# EAGLE board h-bridge_X2 (EAGLE 5.06)
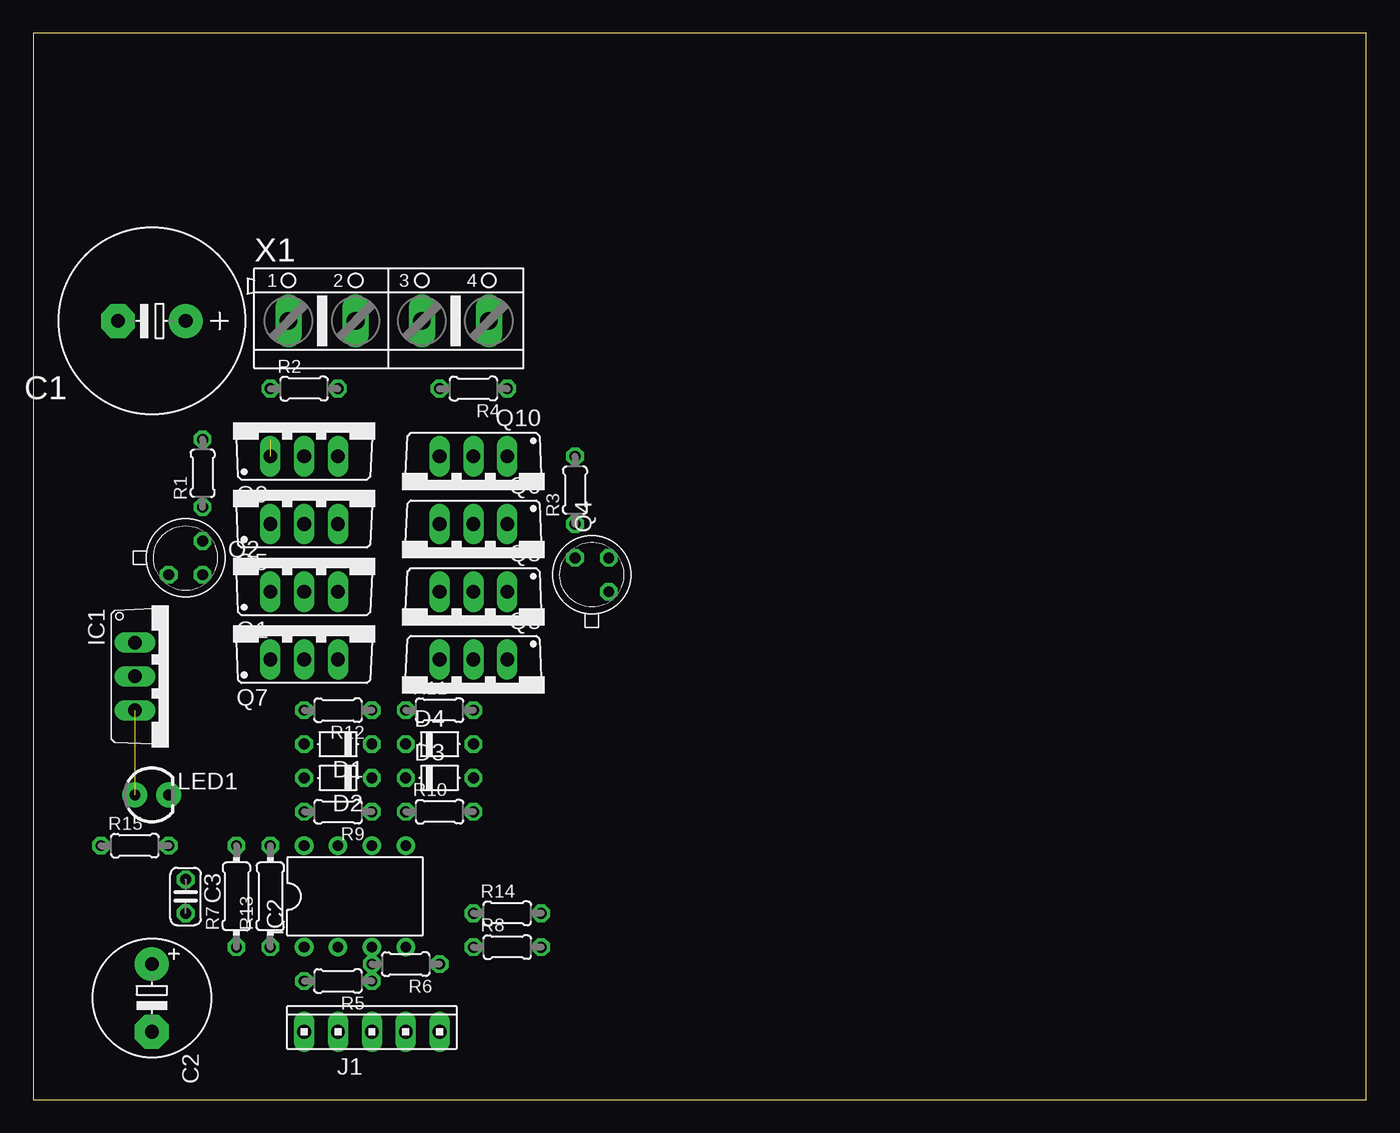
[diagram p0: board, top side]
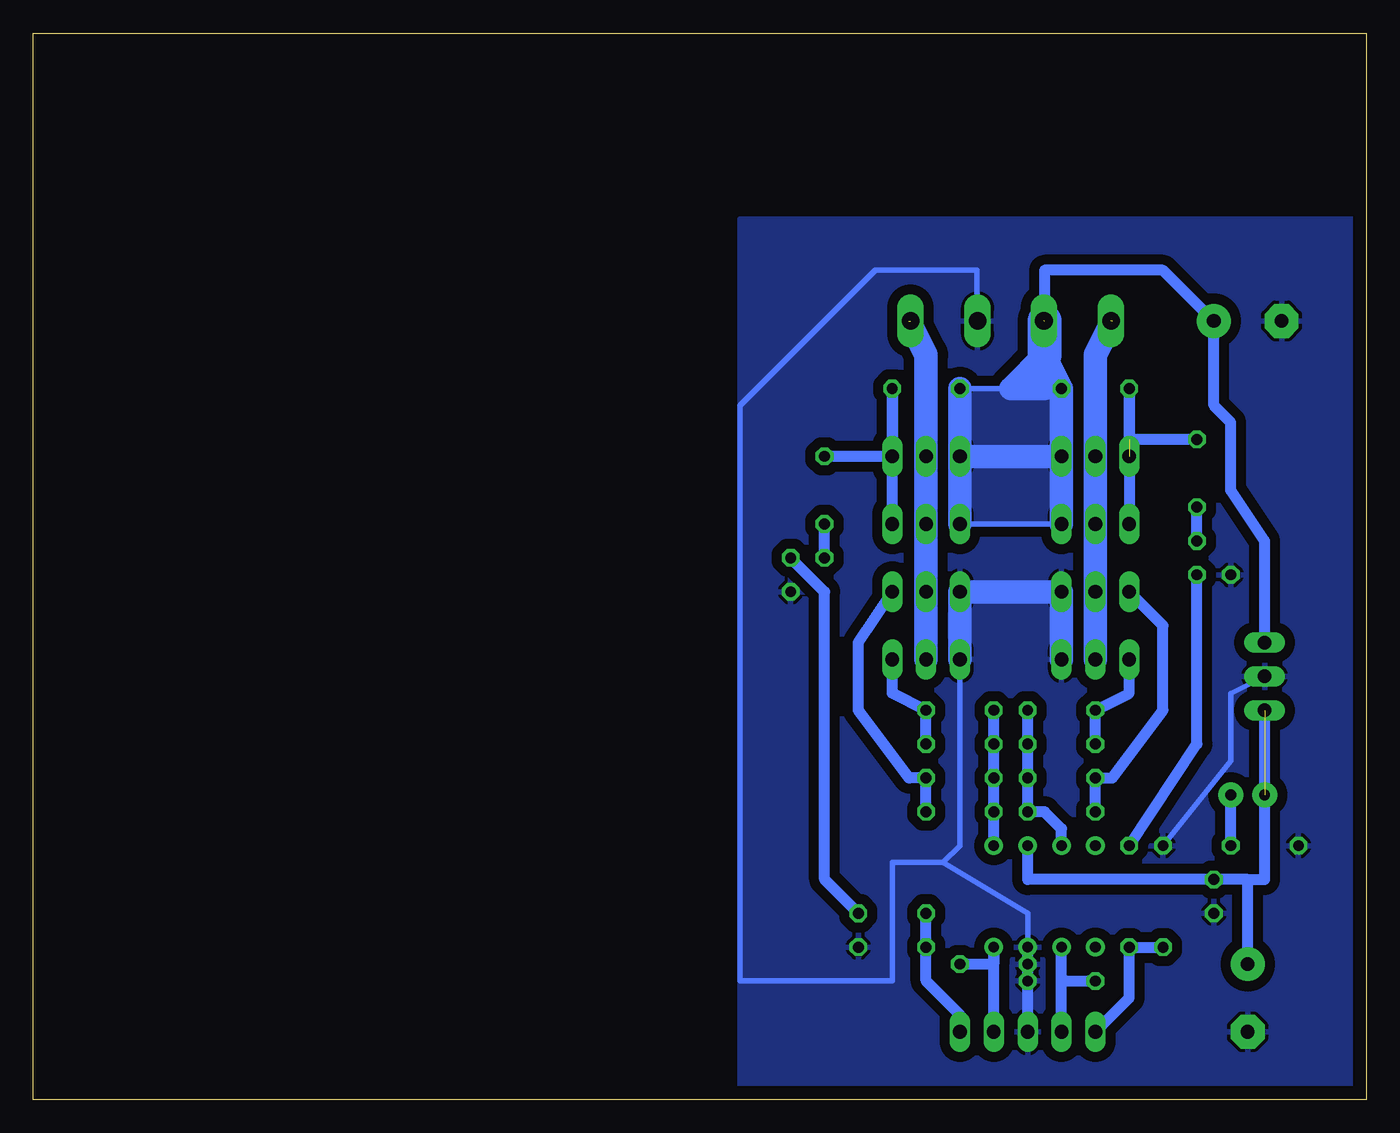
[diagram p1: board, bottom side, seen from below]

Size 100 x 80 mm. Coordinates in mm from the lower left corner, seen from the top.
Outline: 0,0 100,0 100,80 0,80 0,0
Copper layers (1*16): Top 0.035mm / dielectric 1.5mm / Bottom 0.035mm
Design rules "default *": minimum track width 10mil, minimum drill 24mil, track to track 30mil, track to pad 30mil, pad to pad 8mil, via to via 8mil, smd to smd 8mil, copper to edge 40mil, drill to drill 8mil, minimum pad ring 10mil, minimum via ring 8mil, stop-mask expansion 4mil, vias tented up to drill 0mil, thermal gap 10mil

## Footprints (pad centres in the part's own frame; a part is rotated, then mirrored left to right if it is on the bottom)
E5-13 = drill 1.016 pad 2.54 round: + -2.54,0 | drill 1.016 pad 2.54 octagon: - 2.54,0
E5-8,5 = drill 1.016 pad 2.54 round: + -2.54,0 | drill 1.016 pad 2.54 octagon: - 2.54,0
C025-024X044 = drill 0.813 octagon: 1 -1.27,0; 2 1.27,0
D-5 = drill 0.813 octagon: A 2.54,0; C -2.54,0
TO220V = drill 1.016 long: 1 -2.54,-2.54; 2 0,-2.54; 3 2.54,-2.54
DIL08 = drill 0.8 pad 1.4 round: 1 -3.81,-3.81; 2 -1.27,-3.81; 3 1.27,-3.81; 4 3.81,-3.81; 5 3.81,3.81; 6 1.27,3.81; 7 -1.27,3.81; 8 -3.81,3.81
10X05MTA = drill 1.016 long: 1 5.08,0; 2 2.54,0; 3 0,0; 4 -2.54,0; 5 -5.08,0
LED3MM = drill 0.813 pad 1.88 round: A -1.27,0; K 1.27,0
TO220BV = drill 1.016 long: D 0,-2.54; G -2.54,-2.54; S 2.54,-2.54
TO-52 = drill 0.813 octagon: 1 -1.27,-1.27; 2 1.27,-1.27; 3 1.27,1.27
0204/5 = drill 0.813 octagon: 1 -2.54,0; 2 2.54,0
0204/7 = drill 0.813 octagon: 1 -3.81,0; 2 3.81,0
AK500/4 = drill 1.321 long: 1 -7.518,0; 2 -2.489,0; 3 2.489,0; 4 7.518,0

## Placement (x,y rotation side)
C1  [E5-13]  8.89,58.42 180 top
C2  [E5-8,5]  8.89,7.62 270 top
C3  [C025-024X044]  11.43,15.24 270 top
D1  1N4148DO35-7  [D-5]  22.86,26.67 180 top
D2  1N4148DO35-7  [D-5]  22.86,24.13 180 top
D3  1N4148DO35-7  [D-5]  30.48,24.13 0 top
D4  1N4148DO35-7  [D-5]  30.48,26.67 0 top
IC1  7812TV  [TO220V]  10.16,31.75 270 top
IC2  IR4427  [DIL08]  24.13,15.24 0 top
J1  [10X05MTA]  25.4,5.08 0 top
LED1  [LED3MM]  8.89,22.86 0 top
Q1  [TO220BV]  20.32,40.64 0 top
Q2  VN0106N9  [TO-52]  11.43,40.64 0 top
Q3  [TO220BV]  33.02,35.56 180 top
Q4  VN0106N9  [TO-52]  41.91,39.37 90 top
Q5  [TO220BV]  20.32,45.72 0 top
Q6  [TO220BV]  33.02,40.64 180 top
Q7  [TO220BV]  20.32,35.56 0 top
Q8  [TO220BV]  33.02,30.48 180 top
Q9  [TO220BV]  20.32,50.8 0 top
Q10  [TO220BV]  33.02,45.72 180 top
R1  [0204/5]  12.7,46.99 90 top
R2  [0204/5]  20.32,53.34 0 top
R3  [0204/5]  40.64,45.72 90 top
R4  [0204/5]  33.02,53.34 180 top
R5  [0204/5]  22.86,8.89 180 top
R6  [0204/5]  27.94,10.16 180 top
R7  [0204/7]  15.24,15.24 90 top
R8  [0204/5]  35.56,11.43 0 top
R9  [0204/5]  22.86,21.59 180 top
R10  [0204/5]  30.48,21.59 0 top
R11  [0204/5]  30.48,29.21 0 top
R12  [0204/5]  22.86,29.21 180 top
R13  [0204/7]  17.78,15.24 90 top
R14  [0204/5]  35.56,13.97 0 top
R15  [0204/5]  7.62,19.05 0 top
X1  [AK500/4]  26.67,58.42 0 top

## Library data of the parts
C1-C3 R5 R6 = rcl
D1-D4 = diode
IC1 = linear
IC2 = ir
J1 = con-amp
LED1 = SparkFun
Q1 Q3 Q5-Q10 = transistor-power
Q2 Q4 = transistor-fet
R1-R4 R7-R15 = resistor
X1 = con-ptr500

## Nets
GND: C1.- C2.- C3.2 IC1.2 IC2.3 J1.3 Q1.S Q2.1 Q3.S Q4.1 Q7.S Q8.S R5.1 R6.2 R7.2 R8.2 R15.1 X1.3
N$1: Q4.2 R14.2
N$2: Q5.G Q9.G R1.2 R2.1
N$3: Q6.G Q10.G R3.2 R4.1
N$5: Q1.D Q5.D Q7.D Q9.D X1.1
N$6: Q3.D Q6.D Q8.D Q10.D X1.4
N$7: Q2.3 R1.1
N$9: Q4.3 R3.1
N$10: J1.5 R7.1 R13.1
N$11: J1.1 R8.1 R14.1
N$12: IC2.4 J1.2 R6.1
N$13: IC2.2 J1.4 R5.2
N$14: D2.A Q1.G R9.2
N$16: C2.+ C3.1 IC1.3 IC2.6 LED1.A
N$17: D3.A Q3.G R10.2
N$18: D3.C D4.C IC2.5 R10.1 R11.1
N$19: D1.C D2.C IC2.7 R9.1 R12.1
N$20: D1.A Q7.G R12.2
N$21: D4.A Q8.G R11.2
N$22: LED1.K R15.2
N$24: Q2.2 R13.2
V+: C1.+ IC1.1 Q5.S Q6.S Q9.S Q10.S R2.2 R4.2 X1.2

## Tracks (layer width: path | path; a pad name or v marks a point on that pad's centre or on a via)
GND
  Bottom 0.406: IC2.3 25.4,13.97 31.75,17.78 | 29.21,58.42 29.21,62.23 36.83,62.23 46.99,52.07 46.99,8.89 35.56,8.89 35.56,17.78 31.75,17.78 | R7.2 10.16,25.4 10.16,30.48 IC1.2 | Q8.S 30.48,19.05 31.75,17.78
  Bottom 0.813: IC2.3 R5.1 J1.3
  Bottom 1.778: Q7.S Q1.S Q3.S Q8.S
  pour Bottom: 0,66.04 46.99,66.04 46.99,0 0,0
N$1
  Bottom 0.813: R14.2 40.64,16.51 40.64,38.1 Q4.2
N$2  (1 unrouted)
  Bottom 0.813: R1.2 17.78,49.53 R2.1 Q5.G
N$3
  Bottom 0.813: Q6.G R4.1 Q10.G R3.2
N$5  (1 unrouted)
  Bottom 1.778: Q7.D Q1.D Q5.D Q9.D 20.32,55.88 19.05,58.42
N$6  (1 unrouted)
  Bottom 1.778: Q8.D Q3.D Q6.D Q10.D 33.02,55.88 34.29,58.42
N$7
  Bottom 0.813: Q2.3 R1.1
N$9
  Bottom 0.813: Q4.3 R3.1
N$10
  Bottom 0.813: R7.1 R13.1 17.78,7.62 J1.5
N$11
  Bottom 0.813: R14.1 R8.1 33.02,8.89 30.48,6.35 J1.1
N$12
  Bottom 0.813: J1.2 IC2.4 27.94,10.16 R6.1
N$13
  Bottom 0.813: 22.86,8.89 IC2.2 | J1.4 22.86,8.89 | 22.86,8.89 R5.2
N$14
  Bottom 0.813: Q1.G 15.24,35.56 15.24,29.21 19.05,24.13 D2.A | R9.2 D2.A | R9.2 D2.A | R9.2 D2.A | R9.2 D2.A
N$16  (1 unrouted)
  Bottom 0.813: IC2.6 25.4,16.51 C3.1 8.89,16.51 | C2.+ 8.89,16.51 | 8.89,16.51 7.62,16.51 IC1.3
N$17
  Bottom 0.813: D3.A R10.2 D3.A | D3.A 34.29,24.13 38.1,29.21 38.1,34.29 Q3.G
N$18
  Bottom 0.813: R10.1 IC2.5 R10.1 | R10.1 D3.C | D3.C D4.C | D4.C R11.1 D4.C | R10.1 D3.C | D3.C D4.C
N$19
  Bottom 0.813: R9.1 D2.C | D2.C D1.C | D1.C R12.1 D1.C | IC2.7 22.86,20.32 24.13,21.59 R9.1 | D2.C D1.C | R9.1 D2.C
N$20
  Bottom 0.813: Q7.G 17.78,30.48 R12.2 D1.A
N$21
  Bottom 0.813: Q8.G 35.56,30.48 R11.2 D4.A
N$22
  Bottom 0.813: R15.2 LED1.K
N$24
  Bottom 0.813: R13.2 12.7,26.67 Q2.2
V+  (1 unrouted)
  Bottom 0.406: Q5.S Q6.S | R2.2 24.13,53.34 | 26.67,53.34 R4.2
  Bottom 0.813: IC1.1 7.62,41.91 10.16,45.72 10.16,50.8 11.43,52.07 C1.+ 15.24,62.23 24.13,62.23 24.13,58.42
  Bottom 1.778: Q9.S R2.2 24.13,55.88 | Q9.S Q5.S | Q10.S Q6.S R4.2 Q10.S | Q9.S Q10.S | 24.13,55.88 24.13,53.34 26.67,53.34 24.13,55.88
  Bottom 2.54: 24.13,58.42 24.13,55.88
  pour Bottom: 22.86,53.34 22.86,43.18 30.48,43.18 30.48,53.34